# EAGLE board monitoring (EAGLE 7.4.0)
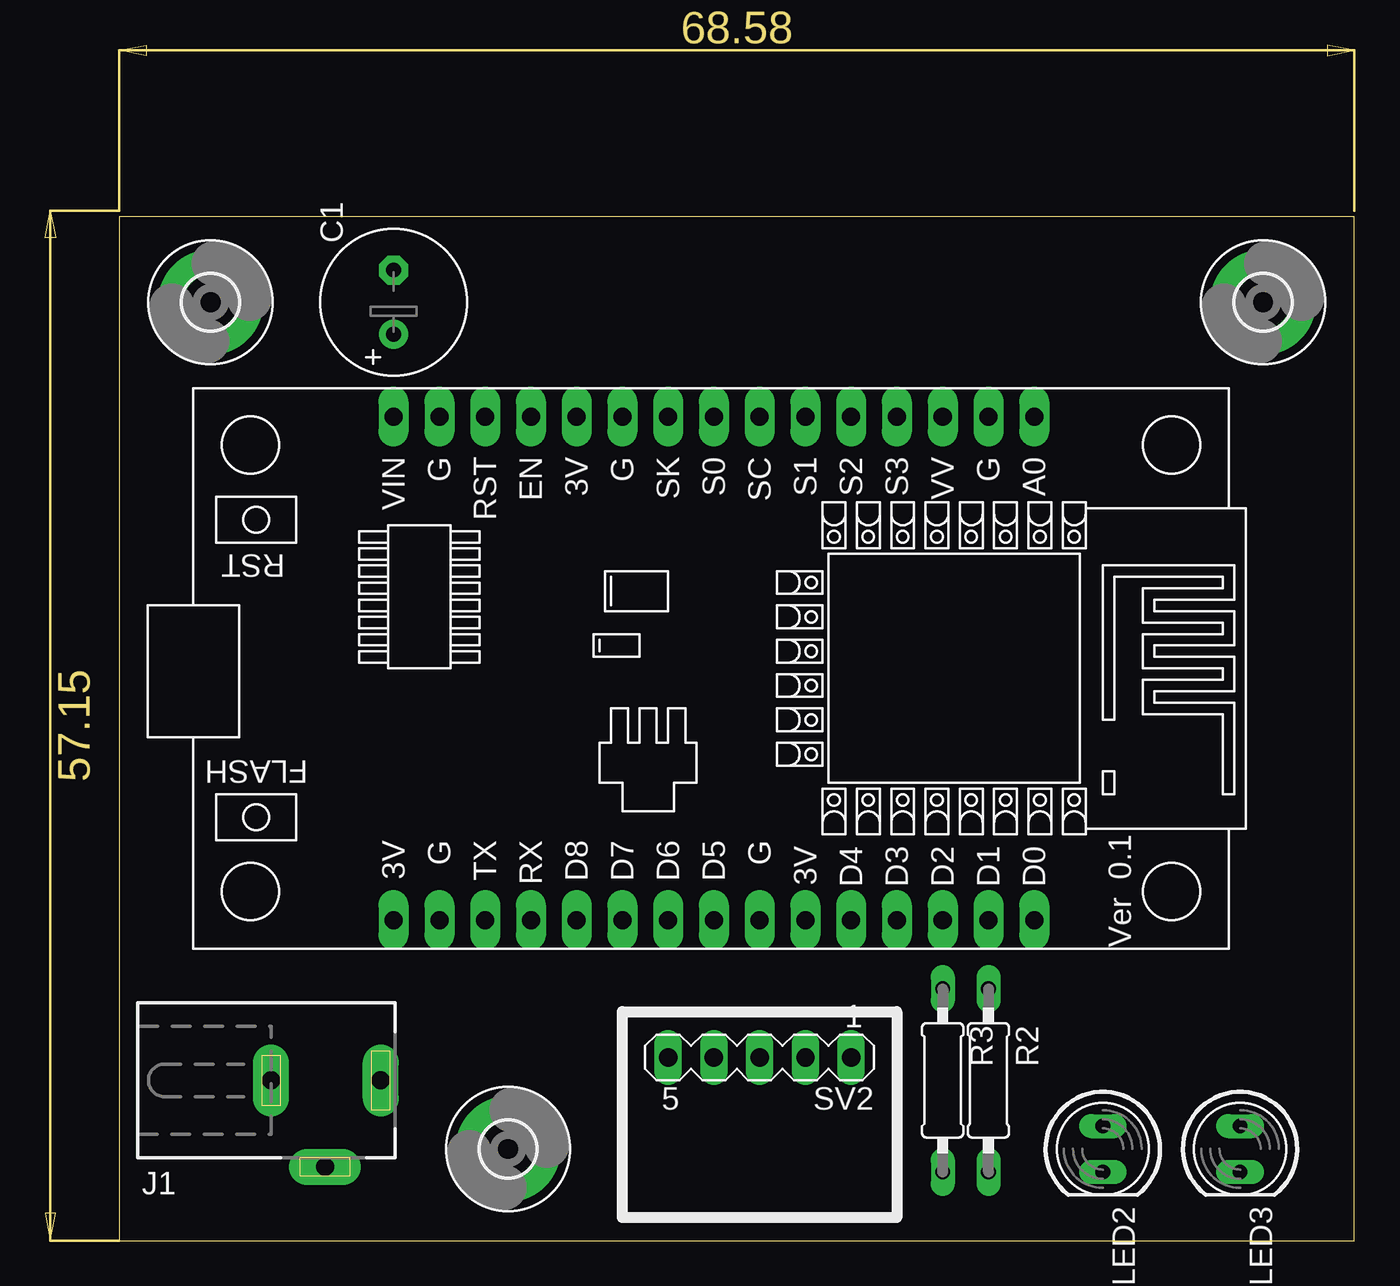
[diagram p0: board, top side]
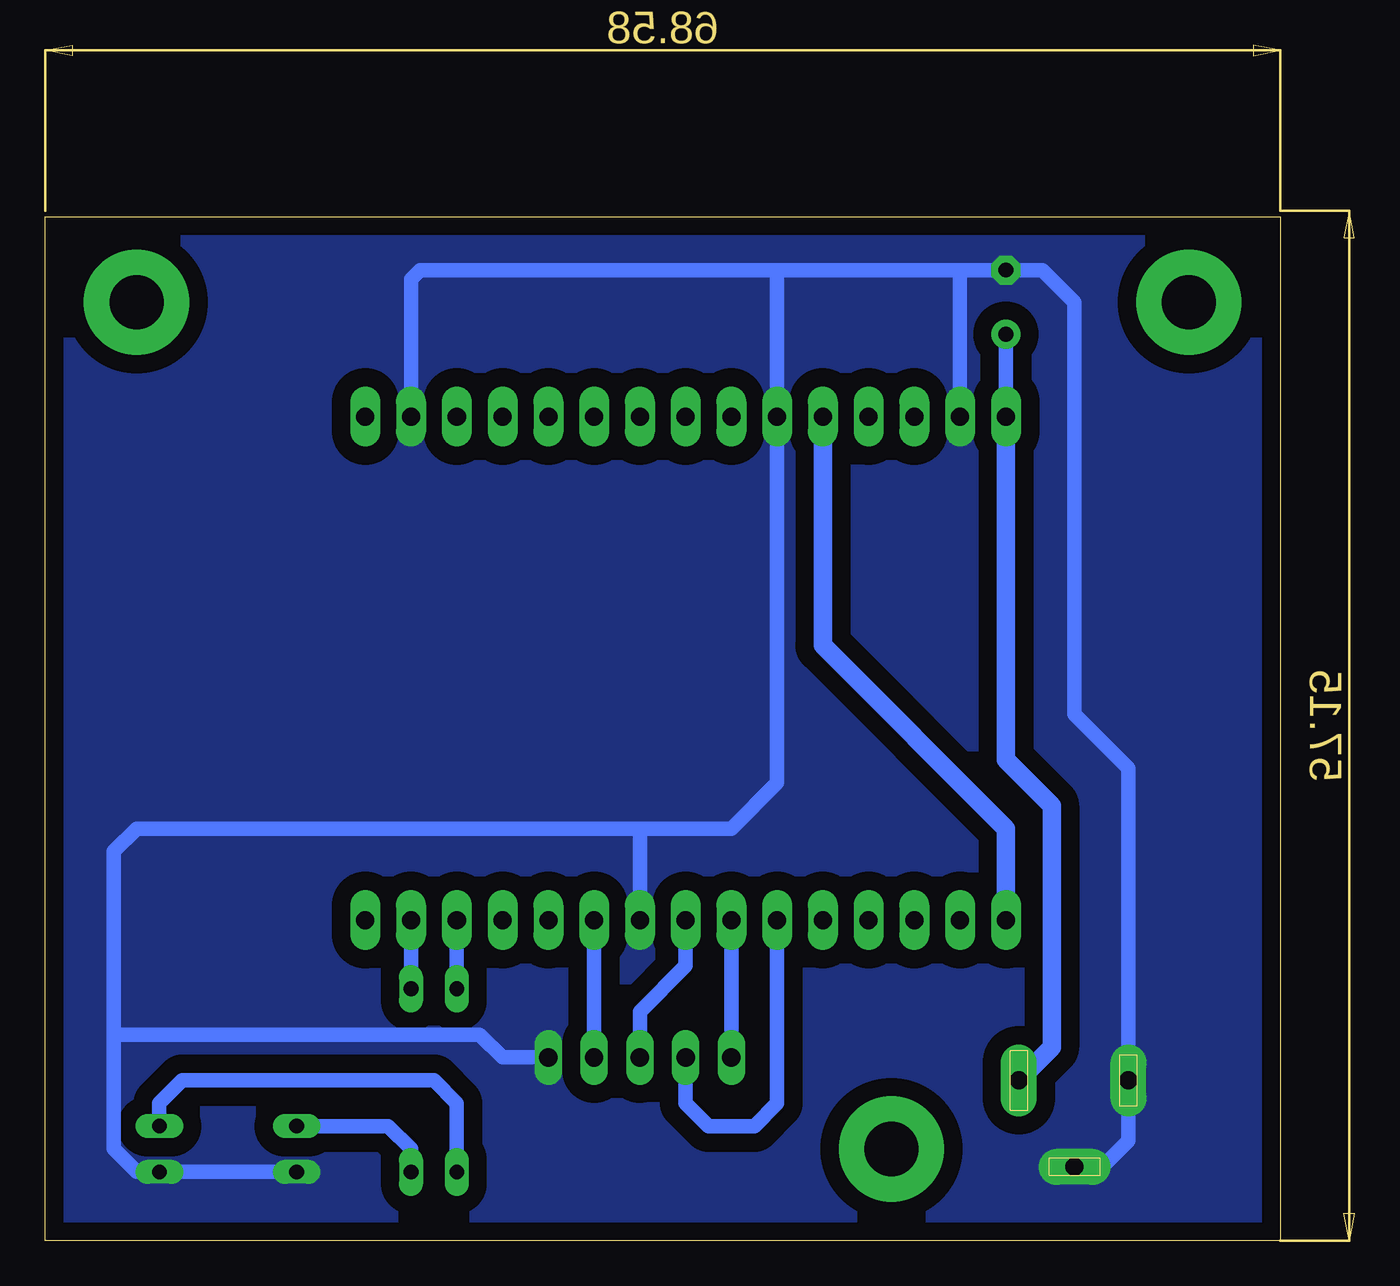
[diagram p1: board, bottom side, seen from below]

Size 68.56 x 56.82 mm. Coordinates in mm from the lower left corner, seen from the top.
Outline: 0,0 68.56,0 68.56,56.82 0,56.82 0,0
Copper layers (1*16): Top 0.035mm / dielectric 1.5mm / Bottom 0.035mm
Design rules "default": minimum track width 10mil, minimum drill 24mil, track to track 8mil, track to pad 8mil, pad to pad 8mil, via to via 8mil, smd to smd 8mil, copper to edge 40mil, drill to drill 8mil, minimum pad ring 10mil, minimum via ring 8mil, stop-mask expansion 4mil, vias tented up to drill 0mil, thermal gap 10mil

## Footprints (pad centres in the part's own frame; a part is rotated, then mirrored left to right if it is on the bottom)
E3,5-8 = drill 0.813 pad 1.6: + -1.778,0 | drill 0.813 pad 1.6 octagon: - 1.778,0
3,0-PAD = drill 3 pad 5.842: B3,0 0,0
DCJ0303 = drill 1 pad 2 long: 1 0,3.1; 2 4.8,0; 3 0,-3
LED5MM = drill 0.813 long: A -1.27,0; K 1.27,0
0207/10 = drill 0.813 long: 1 -5.08,0; 2 5.08,0
MA05-1 = drill 1.016 long: 1 -5.08,0; 2 -2.54,0; 3 0,0; 4 2.54,0; 5 5.08,0
NODEMCU = drill 1 pad 1.676 long: 1 -13.97,17.78; 2 -13.97,15.24; 3 -13.97,12.7; 4 -13.97,10.16; 5 -13.97,7.62; 6 -13.97,5.08; 7 -13.97,2.54; 8 -13.97,0; 9 -13.97,-2.54; 10 -13.97,-5.08; 11 -13.97,-7.62; 12 -13.97,-10.16; 13 -13.97,-12.7; 14 -13.97,-15.24; 15 -13.97,-17.78; 16 13.97,-17.78; 17 13.97,-15.24; 18 13.97,-12.7; 19 13.97,-10.16; 20 13.97,-7.62; 21 13.97,-5.08; 22 13.97,-2.54; 23 13.97,0; 24 13.97,2.54; 25 13.97,5.08; 26 13.97,7.62; 27 13.97,10.16; 28 13.97,12.7; 29 13.97,15.24; 30 13.97,17.78

## Placement (x,y rotation side)
C1  [E3,5-8]  15.24,52.07 90 top
H1  MOUNT-PAD-ROUND3.0  [3,0-PAD]  5.08,52.07 0 top
H2  MOUNT-PAD-ROUND3.0  [3,0-PAD]  21.59,5.08 0 top
H3  MOUNT-PAD-ROUND3.0  [3,0-PAD]  63.5,52.07 0 top
J1  [DCJ0303]  11.43,8.89 270 top
LED2  [LED5MM]  54.61,5.08 270 top
LED3  [LED5MM]  62.23,5.08 270 top
R2  220  [0207/10]  48.26,8.89 270 top
R3  220  [0207/10]  45.72,8.89 270 top
SV2  [MA05-1]  35.56,10.16 180 top
U$2  NODEMCU  [NODEMCU]  33.02,31.75 270 top

## Library data of the parts
C1 R2 R3 = rcl
H1-H3 = holes
J1 = con-jack; OC_FARNELL: unknown; OC_NEWARK: unknown
LED2 LED3 = led
SV2 = con-lstb; OC_FARNELL: unknown; OC_NEWARK: unknown
U$2 = nodemcu

## Nets
3V: U$2.11 U$2.16
+3V3: SV2.2 U$2.25
GND: C1.- J1.2 J1.3 LED2.K LED3.K SV2.1 U$2.2 U$2.10 U$2.14 U$2.24
N$1: SV2.5 U$2.22
N$2: R2.1 U$2.29
N$3: SV2.4 U$2.21
N$4: SV2.3 U$2.23
N$5: R3.1 U$2.28
N$6: LED2.A R2.2
N$7: LED3.A R3.2
N$8: C1.+ J1.1 U$2.15
N$22: U$2.17

## Tracks (layer width: path | path; a pad name or v marks a point on that pad's centre or on a via)
3V
  Bottom 1.016: U$2.11 25.4,33.02 15.24,22.86 U$2.16
+3V3
  Bottom 0.813: U$2.25 SV2.2
GND
  Bottom 0.813: 17.78,53.85 C1.- 13.21,53.85 11.43,52.07 11.43,29.21 8.43,26.21 J1.3 8.43,5.54 9.88,4.09 J1.2 | 17.78,53.85 27.94,53.85 | 27.94,53.85 47.75,53.85 48.26,53.34 U$2.2 | 27.94,53.85 U$2.10 27.94,25.4 30.48,22.86 35.56,22.86 | U$2.14 17.78,53.85 | SV2.1 43.18,10.16 44.45,11.43 64.77,11.43 | 64.77,11.43 64.77,21.59 63.5,22.86 35.56,22.86 | 35.56,22.86 U$2.24 | LED2.K LED3.K 63.5,3.81 64.77,5.08 64.77,11.43
  pour Bottom (isolate 1.016, no thermals): 0,0 0,57.15 68.58,57.15 68.58,0
N$1
  Bottom 0.813: U$2.22 SV2.5
N$2
  Bottom 0.813: R2.1 U$2.29
N$3
  Bottom 0.813: SV2.4 33.02,7.62 31.75,6.35 29.21,6.35 27.94,7.62 U$2.21
N$4
  Bottom 0.813: SV2.3 35.56,12.7 33.02,15.24 U$2.23
N$5
  Bottom 0.813: R3.1 U$2.28
N$6
  Bottom 0.813: LED2.A 49.53,6.35 48.26,5.08 R2.2
N$7
  Bottom 0.813: R3.2 45.72,7.62 46.99,8.89 60.96,8.89 62.23,7.62 LED3.A
N$8
  Bottom 0.813: C1.+ U$2.15
  Bottom 1.016: U$2.15 15.24,26.67 12.7,24.13 12.7,10.72 J1.1